# Altium PCB Печтаная плата.PcbDoc
Units mm, origin at the board's own origin, x right, y up, seen from the top; angles counter-clockwise.
Board outline 140 x 100 mm, 4 copper layers ([1]Top, [2]MWGND, [3]Signal, [4]Power), stack 1.271 mm thick; 48 components, 23 nets, 192 pads, 881 vias.
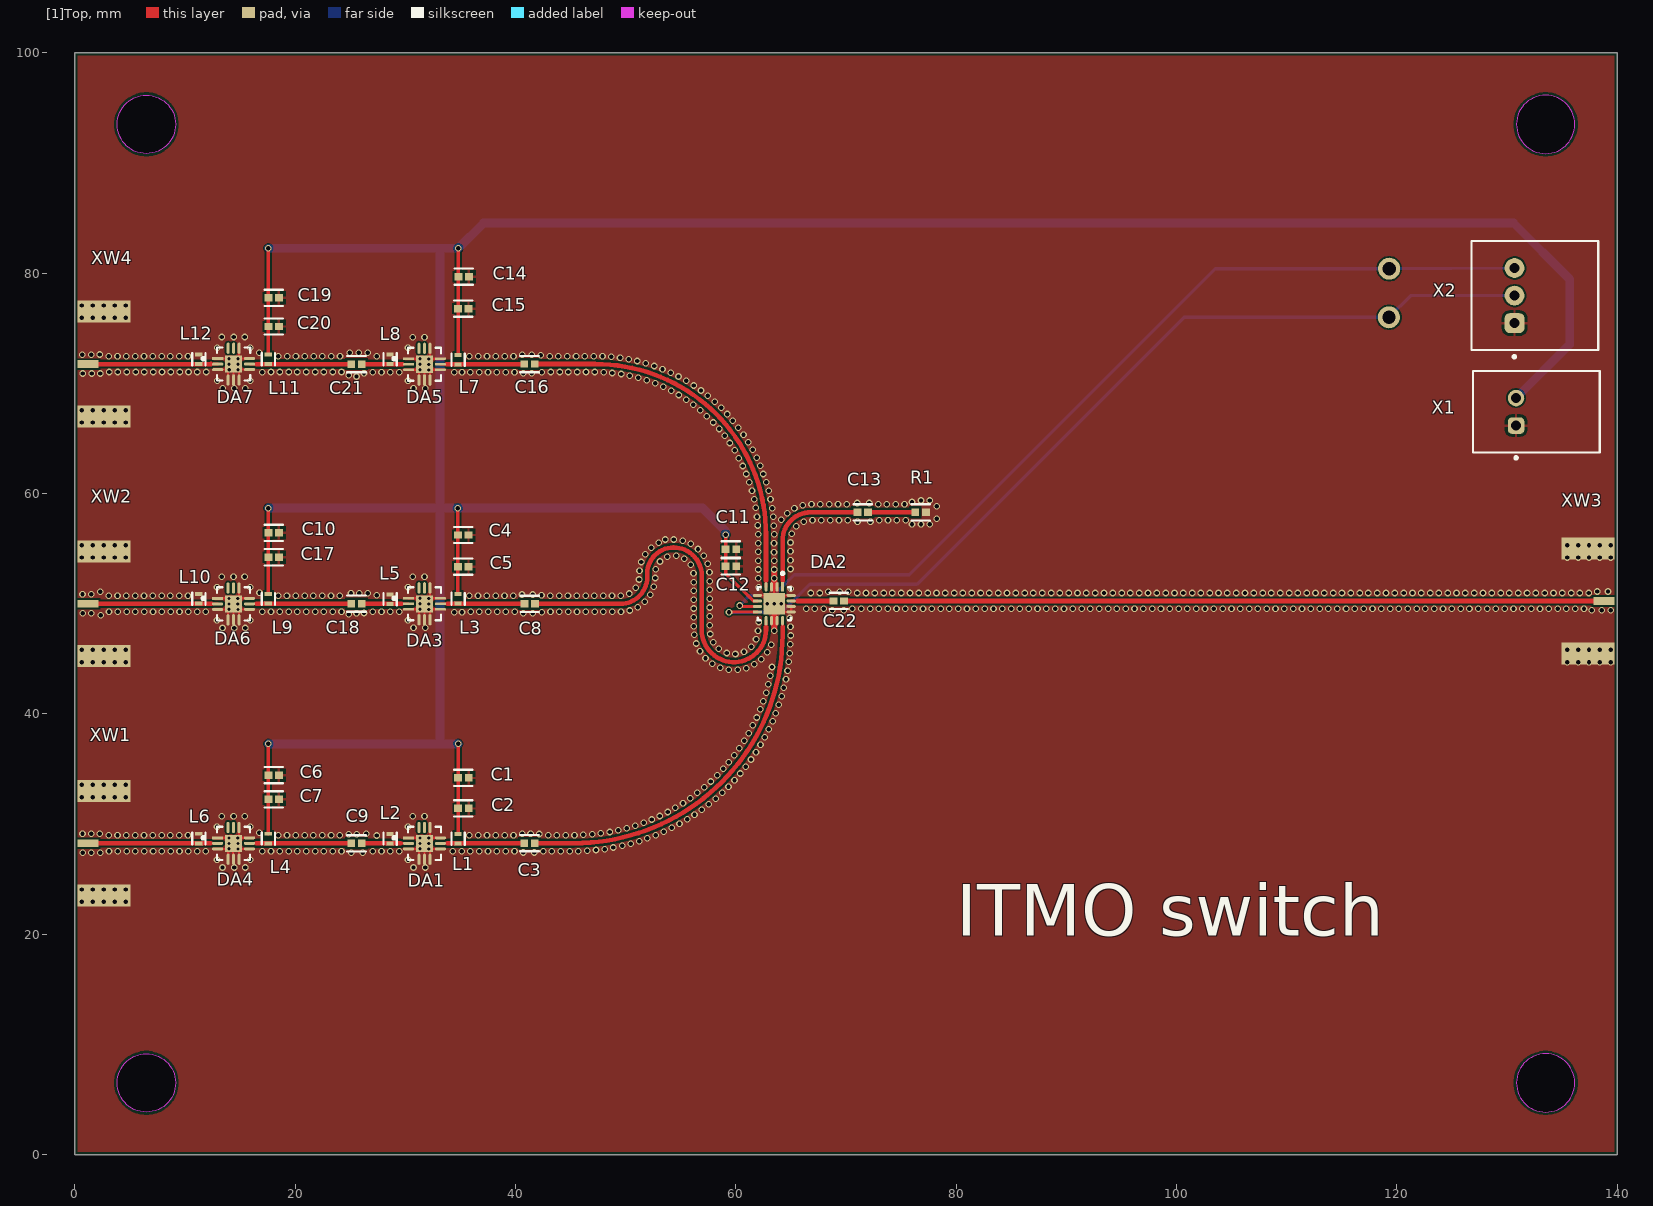
[diagram p0: [1]Top view]
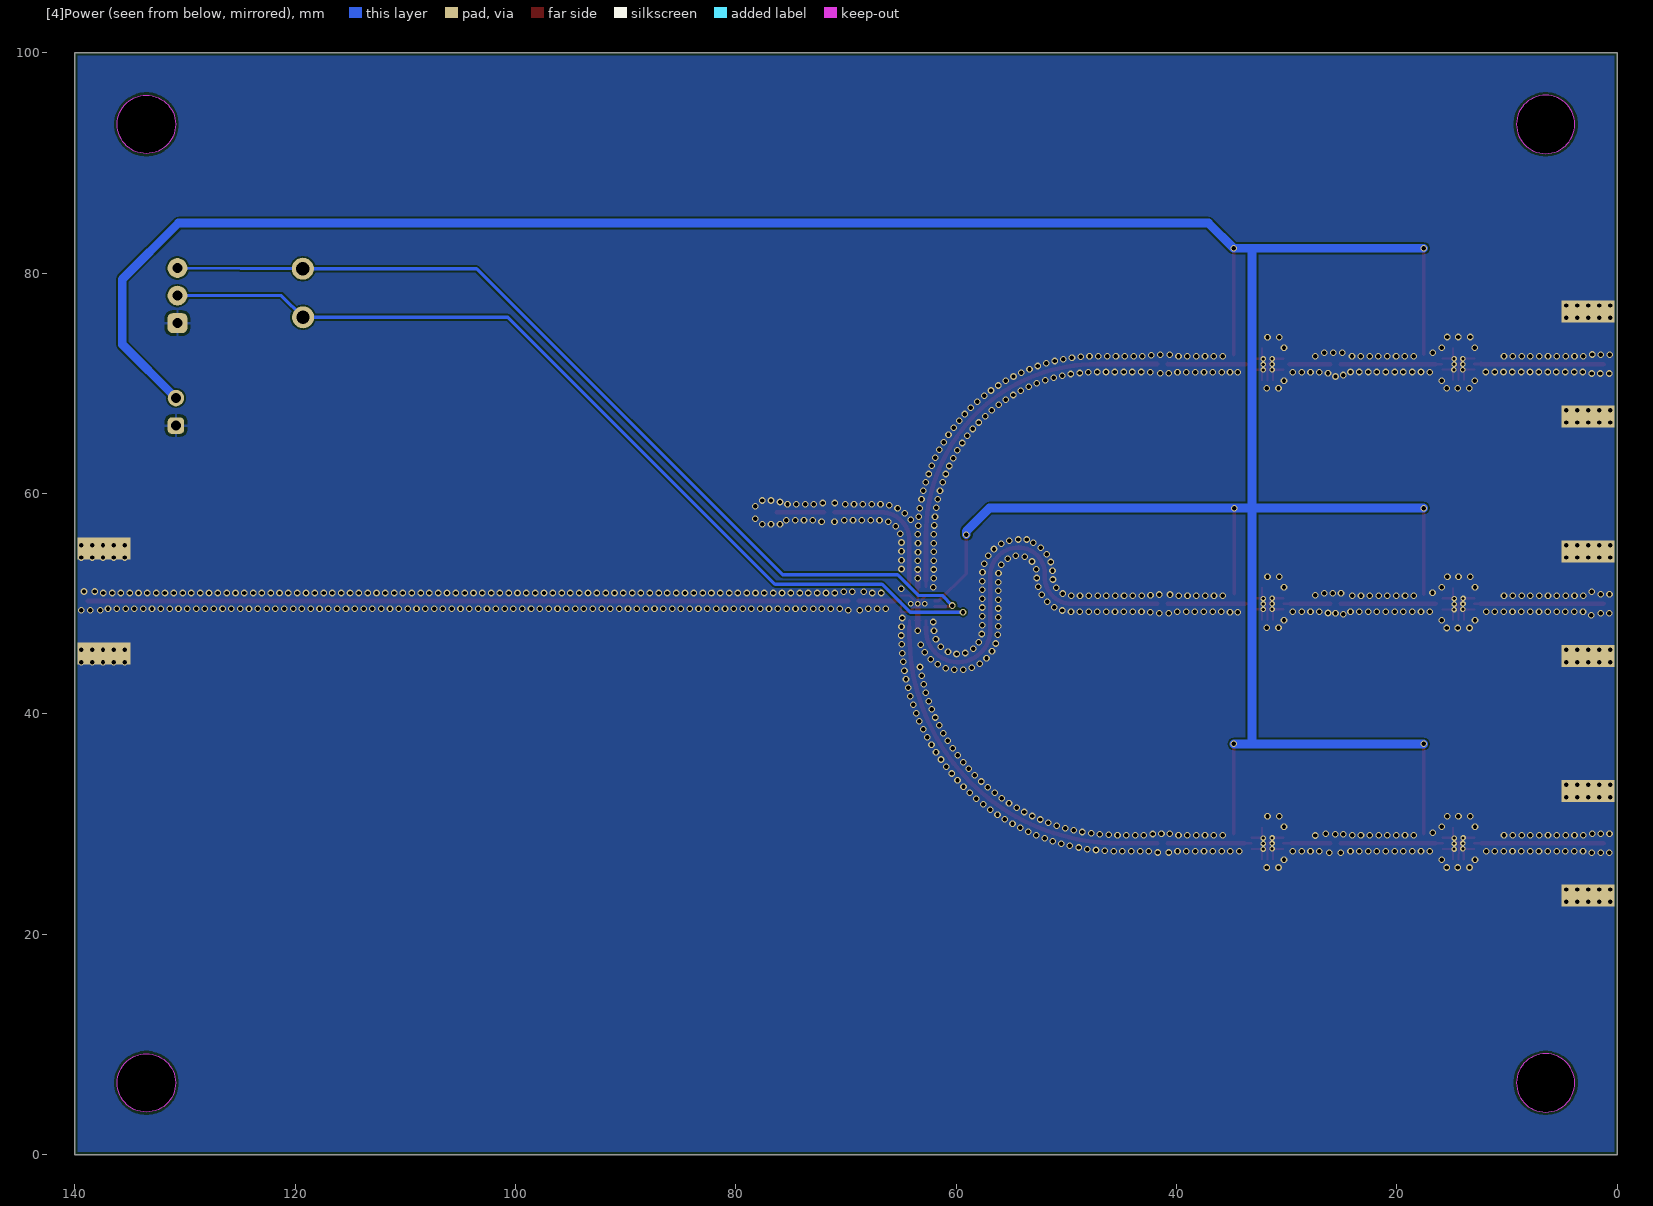
[diagram p1: [4]Power view, seen from below]
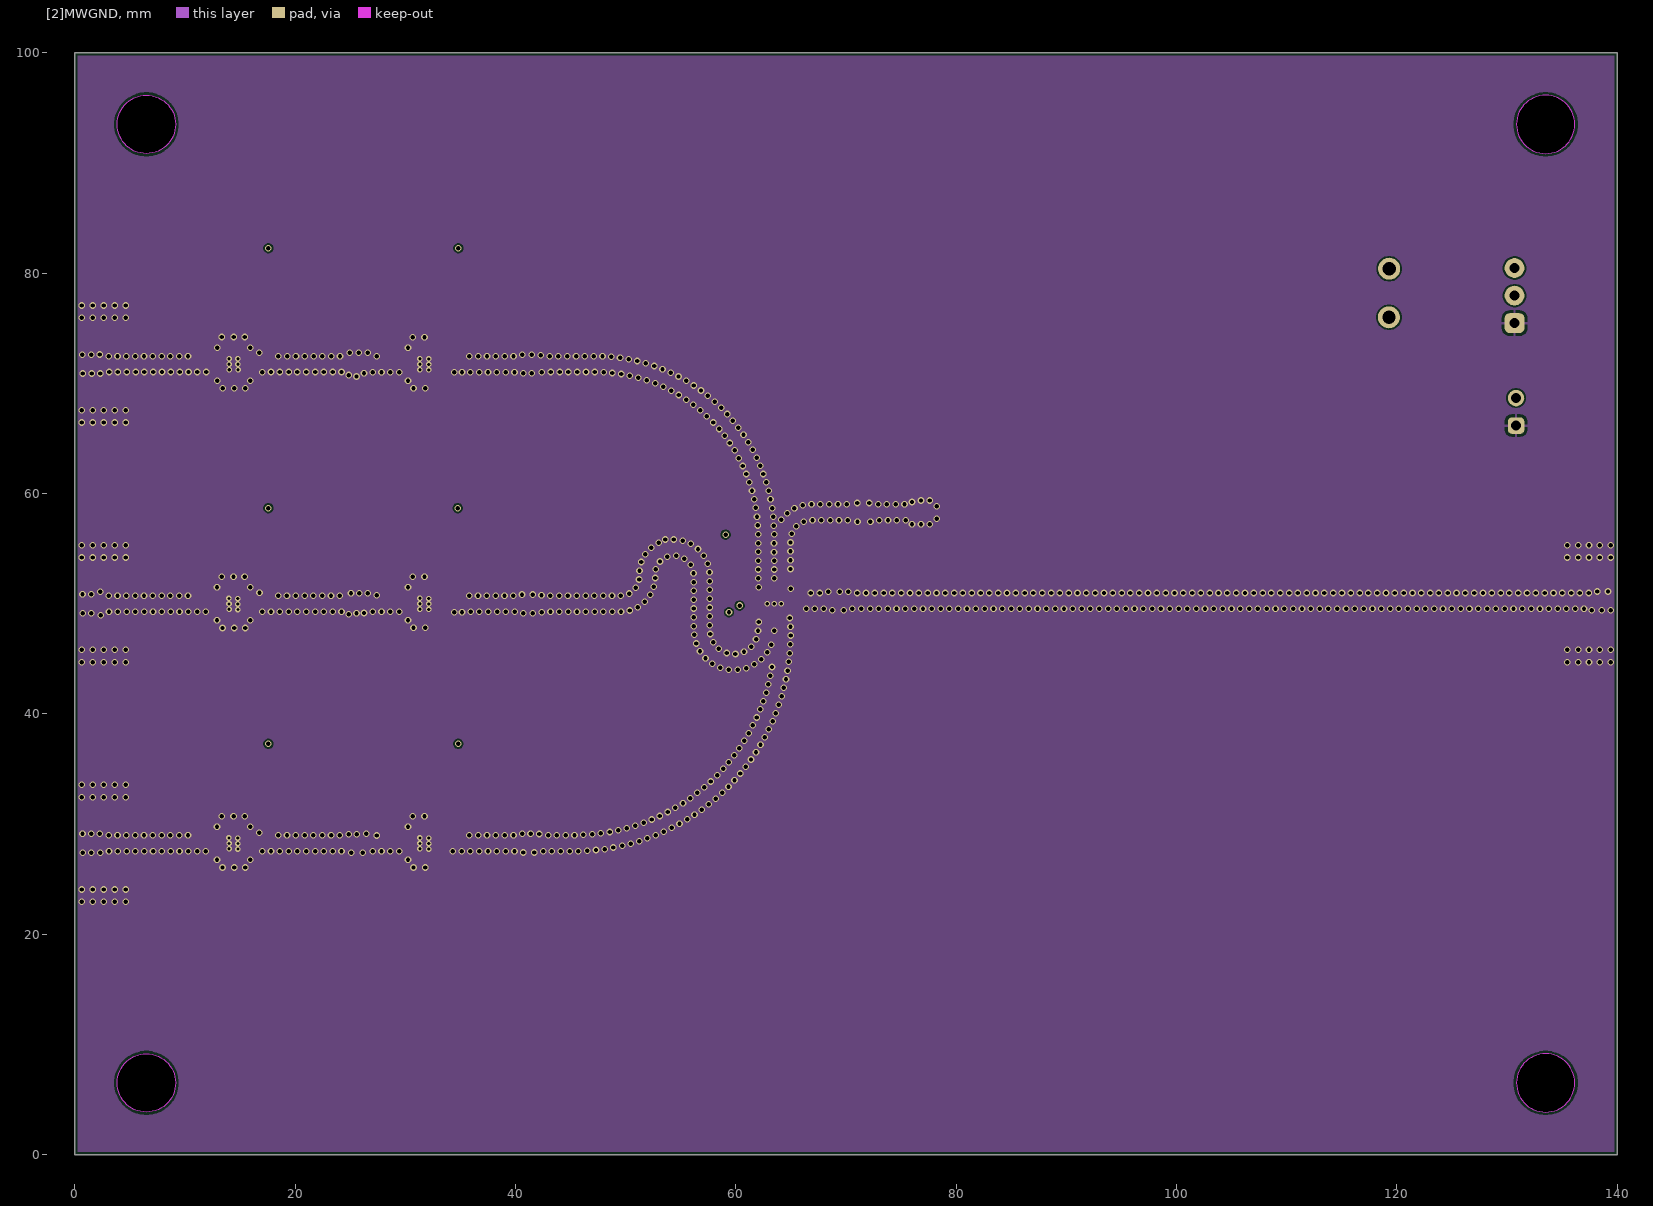
[diagram p2: [2]MWGND]
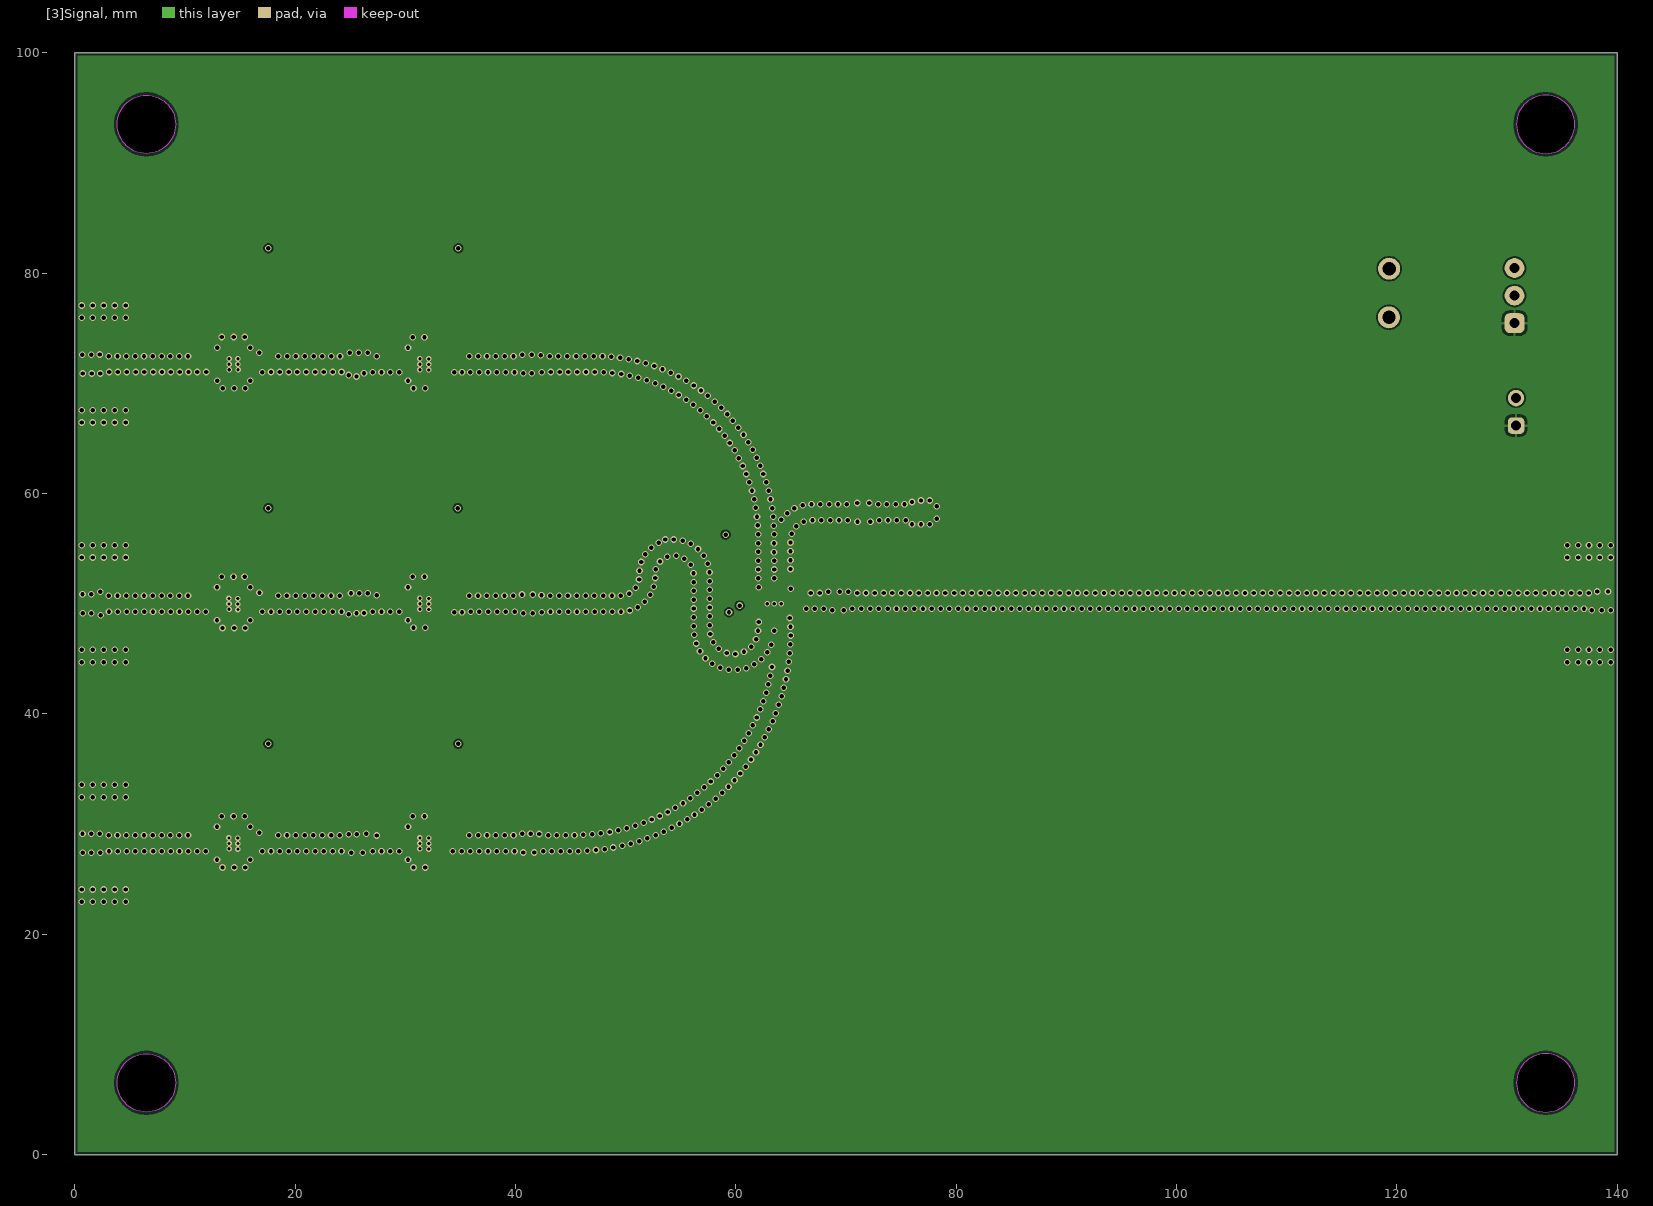
[diagram p3: [3]Signal]
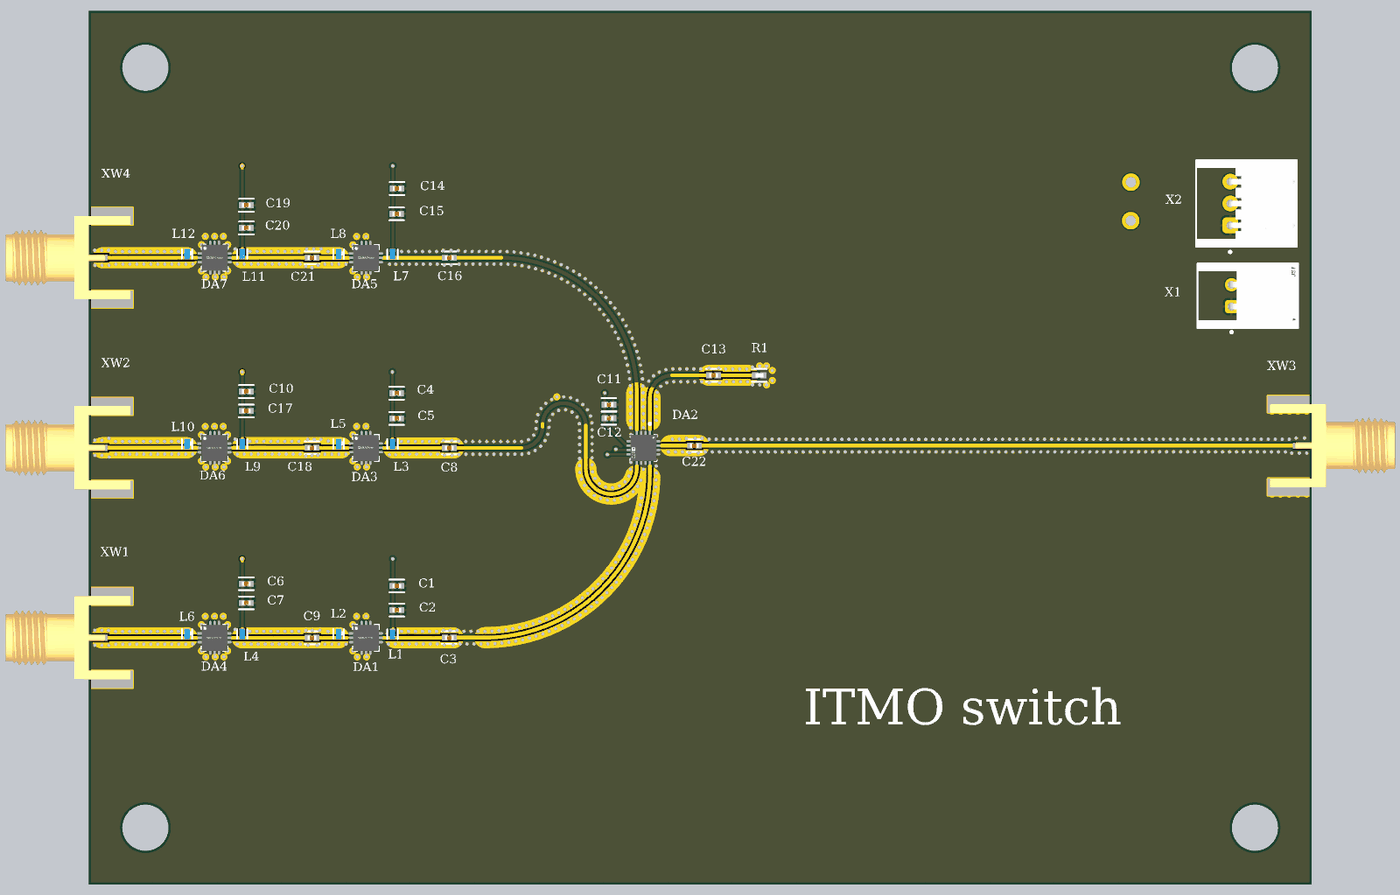
[diagram p4: 3D render of the assembled board from above, using the file's embedded part models]

## Layer stack, top to bottom
Top Solder: solder mask 0.0102, Solder Resist, Dk 3.5
[1]Top: signal copper 0.018
RO4003C: core 0.2032, Core-026, Dk 3.38
[2]MWGND: signal copper 0.018
Dielectric 1: prepreg 0.2083, PP-022, Dk 4.5
[3]Signal: signal copper 0.018
FR-4: core 0.7874, Core-040, Dk 4.6
[4]Power: signal copper 0.018
Bottom Solder: solder mask 0.0102, Solder Resist, Dk 3.5

## Board outline
0.006,0.006 140.006,0.006 140.006,100.006 0.006,100.006
cut-out: 6.506,3.856 cw(c6.506,6.506) 3.856,6.506 cw(c6.506,6.506) 6.506,9.156 cw(c6.506,6.506) 9.156,6.506 cw(c6.506,6.506)
cut-out: 130.856,6.506 ccw(c133.506,6.506) 133.506,3.856 ccw(c133.506,6.506) 136.156,6.506 ccw(c133.506,6.506) 133.506,9.156 ccw(c133.506,6.506)
cut-out: 130.856,93.506 ccw(c133.506,93.506) 133.506,90.856 ccw(c133.506,93.506) 136.156,93.506 ccw(c133.506,93.506) 133.506,96.156 ccw(c133.506,93.506)
cut-out: 6.506,90.856 cw(c6.506,93.506) 3.856,93.506 cw(c6.506,93.506) 6.506,96.156 cw(c6.506,93.506) 9.156,93.506 cw(c6.506,93.506)

## Design rules (kind name [scope] priority, off if disabled: settings)
BoardOutlineClearance [All] p1: gap=0.25 ignorepadtopadclearanceinfootprint=FALSE
Clearance CPWG_1 [InNetClass('RF') vs InNet('GND')] p1: gap=0.2 ignorepadtopadclearanceinfootprint=FALSE except(0.15: Arc-SMDPad Track-SMDPad SMDPad-SMDPad)
Clearance [All] p2: gap=0.15 ignorepadtopadclearanceinfootprint=FALSE
MatchedLengths lia_zochem_ti_umer [InNetClass('RF')] p1: tolerance=1 checknetsindiffpair=TRUE checkdiffpairvsdiffpair=FALSE checkxsignals=FALSE checkothers=FALSE
MinimumSolderMaskSliver [All] p1: minsoldermaskwidth=0.15
PolygonConnect RF_COMPONENTS [(HasFootprint('S-P2152-19CQA') OR HasFootprint('FP-0402HP-MFG')) OR    HasFootprint('FP-DQ1225-IPC_A')  OR HasFootprint('FP-CR0402-IPC_A')  OR HasFootprint('FP-CP-16-38-IPC_A') vs InNet('GND')] p1: connectstyle=Direct reliefconductorwidth=0.254 reliefentries=4 polygonreliefangle="90 Angle" airgapwidth=0.15
PolygonConnect [All] p2: thpad.connectstyle=Relief thpad.reliefconductorwidth=0.254 thpad.reliefentries=4 thpad.polygonreliefangle="90 Angle" thpad.airgapwidth=0.254 smdpad.connectstyle=Relief smdpad.reliefconductorwidth=0.254 smdpad.reliefentries=4 smdpad.polygonreliefangle="90 Angle" smdpad.airgapwidth=0.254 via.connectstyle=Direct via.reliefconductorwidth=0.254 via.reliefentries=4 via.polygonreliefangle="90 Angle" via.airgapwidth=0.254
RoutingVias [All] p1: holewidth=0.4 width=0.6 viastyle="Through Hole" minholewidth=0.3 minwidth=0.5 maxholewidth=0.711 maxwidth=1
SolderMaskExpansion CPWG [InNetClass('RF')] p1: expansion=1 istentingtop=FALSE
SolderMaskExpansion [All] p2: expansion=0.102 istentingtop=FALSE
SupplyNets "Schematic Supply Nets_1" [InNet('+5')] p1: voltage=0.000
SupplyNets "Schematic Supply Nets" [InNet('GND')] p2: voltage=0.000
Width micro_strip [InNetClass('RF')] p1: maxlimit=0.5 minlimit=0.254 preferedwidth=0.254 toplayer_minwidth=0.418 toplayer_maxwidth=0.418 toplayer_prefwidth=0.418 impedanceprofiledriven=TRUE impedanceprofileid={426BE0D7-A08D-4F41-A99D-DD10C29EF04F} impedanceprofilevalue=50.000000 minimp=50.000000 maximp=50.000000 favimp=50.000000 checkconnectedcopper=TRUE
Width [All] p2: maxlimit=0.8 minlimit=0.2 preferedwidth=0.3
29 further rules are at their usual default settings.

## Classes and differential pairs
net class RF_SAME: NetC3_1 NetC8_1 NetC9_2 NetC18_2 NetC21_1 NetDA7_2
net class RF: NetC3_1 NetC3_2 NetC8_1 NetC8_2 NetC9_1 NetC9_2 NetC13_1 NetC13_2 NetC16_1 NetC16_2 NetC18_1 NetC18_2 NetC21_1 NetC21_2 NetC22_1 NetC22_2 NetDA4_2 NetDA6_2 NetDA7_2
component class AMP4: XW3
component class AMP3: DA5 XW4
component class AMP2: DA3
component class AMP1: DA1 DA6 DA7 XW1

## Components (designator, comment, footprint, x,y, rotation, side; value= is the part's Value field where it differs from the comment)
C1 "10pF" FP-GJM155-0_05-IPC_A 35.285,34.186 r0 top
C2 "10nF" FP-GJM155-0_05-IPC_A 35.285,31.417 r0 top
C3 "100 pF" FP-GJM155-0_05-IPC_A 41.279,28.268 r180 top
C4 "10pF" FP-GJM155-0_05-IPC_A 35.259,56.233 r0 top
C5 "10nF" FP-GJM155-0_05-IPC_A 35.259,53.363 r0 top
C6 "10pF" FP-GJM155-0_05-IPC_A 18.057,34.434 r0 top
C7 "10nF" FP-GJM155-0_05-IPC_A 18.057,32.244 r0 top
C8 "100pF" FP-GJM155-0_05-IPC_A 41.296,49.985 r180 top
C9 "100 pF" FP-GJM155-0_05-IPC_A 25.578,28.251 r180 top
C10 "10pF" FP-GJM155-0_05-IPC_A 18.057,56.437 r0 top
C11 "10 nF" FP-GJM155-0_05-IPC_A 59.563,54.938 r180 top
C12 "10 pF" FP-GJM155-0_05-IPC_A 59.563,53.388 r180 top
C13 "100pF" FP-GJM155-0_05-IPC_A 71.526,58.291 r180 top
C14 "10pF" FP-GJM155-0_05-IPC_A 35.302,79.677 r0 top
C15 "10nF" FP-GJM155-0_05-IPC_A 35.259,76.782 r0 top
C16 "100pF" FP-GJM155-0_05-IPC_A 41.279,71.753 r180 top
C17 "10nF" FP-GJM155-0_05-IPC_A 18.057,54.217 r0 top
C18 "100 pF" FP-GJM155-0_05-IPC_A 25.578,50 r180 top
C19 "10pF" FP-GJM155-0_05-IPC_A 18.057,77.764 r0 top
C20 "10nF" FP-GJM155-0_05-IPC_A 18.057,75.16 r0 top
C21 "100 pF" FP-GJM155-0_05-IPC_A 25.578,71.75 r180 top
C22 "100 pF" FP-GJM155-0_05-IPC_A 69.342,50.25 r180 top
DA1 "PMA3-83LN+" FP-DQ1225-IPC_A 31.751,28.25 r0 top
DA2 "HMC7992" FP-CP-16-38-IPC_A 63.5,50 r270 top
DA3 "PMA3-83LN+" FP-DQ1225-IPC_A 31.751,49.993 r0 top
DA4 "PMA3-83LN+" FP-DQ1225-IPC_A 14.42,28.251 r0 top
DA5 "PMA3-83LN+" FP-DQ1225-IPC_A 31.751,71.735 r0 top
DA6 "PMA3-83LN+" FP-DQ1225-IPC_A 14.419,49.987 r0 top
DA7 "PMA3-83LN+" FP-DQ1225-IPC_A 14.428,71.747 r0 top
L1 "39 nH" FP-0402HP-MFG 34.798,28.671 r90 top
L2 "18nH" FP-0402HP-MFG 28.626,28.677 r270 top
L3 "39nH" FP-0402HP-MFG 34.798,50.439 r90 top
L4 "39 nH" FP-0402HP-MFG 17.579,28.686 r90 top
L5 "18nF" FP-0402HP-MFG 28.626,50.417 r270 top
L6 "18nH" FP-0402HP-MFG 11.268,28.686 r270 top
L7 "39nH" FP-0402HP-MFG 34.798,72.156 r90 top
L8 "18nH" FP-0402HP-MFG 28.626,72.181 r270 top
L9 "39 nH" FP-0402HP-MFG 17.579,50.435 r90 top
L10 "18nH" FP-0402HP-MFG 11.268,50.435 r270 top
L11 "39 nH" FP-0402HP-MFG 17.579,72.185 r90 top
L12 "18nH" FP-0402HP-MFG 11.268,72.185 r270 top
R1 "100" FP-CR0402-IPC_A 76.775,58.291 r180 top
X1 "JST-2P" FP-S2B-XH-A-1_LF_SN-MFG 132.67,67.415 r270 top
X2 "JST-3P" FP-S3B-XH-A-1_LF_SN-MFG 132.535,77.965 r270 top
XW1 "SMA" S-P2152-19CQA 2.676,33 r180 top
XW2 "SMA" S-P2152-19CQA 2.676,54.75 r180 top
XW3 "SMA" S-P2152-19CQA 137.349,45.5 r0 top
XW4 "SMA" S-P2152-19CQA 2.676,76.5 r180 top

## Footprints (in the part's own frame and the unit in brackets; to place one, negate y for a bottom-side part, rotate by r counter-clockwise, add the part's x,y. Pads: shape width x height; smd on the part's side, far side on the other; paste and mask are expansions set on the pad)
FP-0402HP-MFG [mm]
  rect 0.36x0.66 smd paste+0 mask+0: 1(-0.435,0) 2(0.435,0)
  silkscreen extent -0.56,-0.6 0.55,0.6, body extent -0.71,-0.46 0.71,0.46, height 0.25
FP-CP-16-38-IPC_A [mm]
  rect 0.846x0.242 smd paste+0 mask+0: 1(-1.533,0.75)
  rrect100% 0.846x0.242 smd paste+0 mask+0: 2(-1.533,0.25) 3(-1.533,-0.25) 4(-1.533,-0.75) 9(1.533,-0.75) 10(1.533,-0.25) 11(1.533,0.25) 12(1.533,0.75)
  rrect100% 0.242x0.846 smd paste+0 mask+0: 5(-0.75,-1.533) 6(-0.25,-1.533) 7(0.25,-1.533) 8(0.75,-1.533) 13(0.75,1.533) 14(0.25,1.533) 15(-0.25,1.533) 16(-0.75,1.533)
  rect 1.92x1.92 smd paste-1000 mask+0: 17(0,0)
  silkscreen extent -2.88,-1.5 1.5,1.5, body extent -2.46,-2.46 2.46,2.46, height 0.25
FP-CR0402-IPC_A [mm]
  rect 0.715x0.672 smd paste+0 mask+0: 1(-0.479,0) 2(0.479,0)
  silkscreen extent -0.84,-0.74 0.84,0.74, body extent -1.04,-0.54 1.04,0.54, height 0.25
FP-DQ1225-IPC_A [mm]
  rect 1.019x0.262 smd paste+0 mask+0: 1(-1.447,0.5)
  rrect100% 1.019x0.262 smd paste+0 mask+0: 2(-1.447,0) 3(-1.447,-0.5) 7(1.447,-0.5) 8(1.447,0) 9(1.447,0.5)
  rrect100% 0.262x1.019 smd paste+0 mask+0: 4(-0.5,-1.447) 5(0,-1.447) 6(0.5,-1.447) 10(0.5,1.447) 11(0,1.447) 12(-0.5,1.447)
  rect 1.549x1.549 smd paste-1000 mask+0: 13(0,0)
  silkscreen extent -2.88,-1.5 1.5,1.5, body extent -2.46,-2.46 2.46,2.46, height 0.25
FP-GJM155-0_05-IPC_A [mm]
  rect 0.715x0.672 smd paste+0 mask+0: 1(-0.479,0) 2(0.479,0)
  silkscreen extent -0.84,-0.74 0.84,0.74, body extent -1.04,-0.54 1.04,0.54, height 0.25
FP-S2B-XH-A-1_LF_SN-MFG [mm]
  rrect50% 1.5x1.5 hole 0.9 paste-2539.97 mask+0: 1(1.25,-1.85)
  round 1.5 hole 0.9 paste-2539.97 mask+0: 2(-1.25,-1.85)
  silkscreen extent -3.7,-5.75 4.3,5.75, body extent -3.8,-5.85 3.8,5.85, height 0.25
FP-S3B-XH-A-1_LF_SN-MFG [mm]
  rrect50% 1.8x1.8 hole 0.9 paste-2539.97 mask+0: 1(2.5,-1.85)
  round 1.8 hole 0.9 paste-2539.97 mask+0: 2(0,-1.85) 3(-2.5,-1.85)
  silkscreen extent -4.95,-5.75 5.67,5.75, body extent -5.05,-5.85 5.05,5.85, height 0.25
S-P2152-19CQA [mm]
  rect 1.9x0.7 smd: 1(1.45,4.75)
  rect 4.8x2 smd: 2(0,9.5) 2(0,0)
  rect 4.8x2 smd far side: 2(0,9.5) 2(0,0)
  body extent -2.1,-0.02 12.18,9.51, height 4.46

## Part data
C1 C2 C3 C4 C5 C6 C7 C8 C9 C10 C11 C12 C13 C14 C15 C16 C17 C18 C19 C20 C21 C22: library part C
L1 L2 L3 L4 L5 L6 L7 L8 L9 L10 L11 L12: library part L
R1: library part R
X1 X2: "JST type connector", Net1=GND
  X1: Net2=+5V
  X2: Net2=A, Net3=B
DA1 DA4 DA6 DA7 XW1: ClassName=AMP1
DA3 XW2: ClassName=AMP2
DA5 XW4: ClassName=AMP3
XW3: ClassName=AMP4

## Free pads (board coordinates)
  round 2 hole 1.2 paste-2539.97 mask+0: MH5(119.305,80.405) MH6(119.28,75.995)

## Via types
v1: diameter 0.6, hole 0.4, [1]Top to [4]Power, 836 vias
v2: diameter 0.5, hole 0.3, [1]Top to [4]Power, 39 vias
v3: diameter 0.6, hole 0.4, [1]Top to [4]Power, tented both sides, 6 vias

## Nets (pads, with @x,y where several pads share a name; then routed paths per layer and width w, separated by ;. In a path a pad name is that pad's centre, name@x,y a point inside that pad or via, vN(x,y) a via of type N, cw(c..) or ccw(c..) an arc to the next point about the centre after c; other vN are vias at no path point)
+5: C1.1 C2.1 C4.1 C5.1 C6.1 C7.1 C10.1 C11.2 C12.2 C14.1 C15.1 C17.1 C19.1 C20.1 DA2.6 L1.2 L3.2 L4.2 L7.2 L9.2 L11.2 X1.2 | length 297.6
  [1]Top w0.3: L4.2 v1(17.579,37.275) ; L9.2 v1(17.579,58.675) ; L11.2 v1(17.579,82.26) ; v3(34.765,58.675) 34.782,58.659 34.782,50.89 L3.2 ; L1.2 34.807,29.115 34.807,37.267 v3(34.815,37.275) ; L7.2 34.811,72.603 34.811,82.247 v3(34.823,82.26) ; v3(59.084,56.268) C11.2 59.084,52.735 61.569,50.25 DA2.6
  [4]Power w0.8: v1(17.579,37.275) 33.15,37.275 ; v1(17.579,58.675) 33.15,58.675 ; v1(17.579,82.26) 33.15,82.26 ; v3(34.815,37.275) 33.15,37.275 ; v3(59.084,56.268) 59.084,56.581 56.99,58.675 v3(34.765,58.675) 33.15,58.675 ; X1.2 135.695,73.54 135.695,79.445 130.583,84.557 37.12,84.557 v3(34.823,82.26) 33.15,82.26 ; 33.15,37.275 33.15,58.675 ; 33.15,58.675 33.15,82.26
A: DA2.8 pad.MH6 X2.2 | length 85.8
  [1]Top w0.254: v3(59.385,49.223) 59.407,49.244 61.961,49.244 DA2.8
  [4]Power w0.3: v3(59.385,49.223) 64.194,49.223 66.736,51.765 76.455,51.765 100.685,75.995 pad.MH6 121.25,77.965 X2.2
B: DA2.7 pad.MH5 X2.3 | length 84.6
  [1]Top w0.254: v3(60.35,49.832) 60.444,49.832 60.526,49.75 DA2.7
  [4]Power w0.3: v3(60.35,49.832) 61.268,50.75 63.452,50.75 65.327,52.625 75.76,52.625 103.54,80.405 pad.MH5 X2.3
GND: C1.2 C2.2 C4.2 C5.2 C6.2 C7.2 C10.2 C11.1 C12.1 C14.2 C15.2 C17.2 C19.2 C20.2 DA1.1 DA1.3 DA1.4 DA1.5 DA1.6 DA1.7 DA1.9 DA1.10 DA1.13 DA2.2 DA2.3 DA2.5 DA2.10 DA2.11 DA2.13 DA2.14 DA2.16 DA2.17 DA3.1 DA3.3 DA3.4 DA3.5 DA3.6 DA3.7 DA3.9 DA3.10 DA3.13 DA4.1 DA4.3 DA4.4 DA4.5 DA4.6 DA4.7 DA4.9 DA4.10 DA4.13 DA5.1 DA5.3 DA5.4 DA5.5 DA5.6 DA5.7 DA5.9 DA5.10 DA5.13 DA6.1 DA6.3 DA6.4 DA6.5 DA6.6 DA6.7 DA6.9 DA6.10 DA6.13 DA7.1 DA7.3 DA7.4 DA7.5 DA7.6 DA7.7 DA7.9 DA7.10 DA7.13 L2.1 L5.1 L6.1 L8.1 L10.1 L12.1 R1.1 X1.1 X2.1 XW1.2 XW2.2 XW3.2 XW4.2 | length 67.9
  [1]Top w0.2: DA6.3 13.919,49.487 DA6.4 ; DA6.1 13.919,50.487 DA6.13 ; DA4.3 13.746,27.751 14.036,28.041 14.036,28.141 DA4.13@14.146,28.251 ; DA4.1 13.92,28.751 DA4.13 ; DA7.3 13.928,71.247 DA7.4 ; DA7.1 13.928,72.247 DA7.13 DA7.5 ; DA4.4 13.93,26.814 13.93,27.761 DA4.13@14.146,27.976 ; DA4.13@13.933,28.244 13.939,28.251 DA4.13@14.146,28.251 ; DA4.13@14.378,27.977 14.378,27.293 14.408,27.263 14.408,26.815 DA4.5 ; DA6.5 DA6.13 ; DA6.6 DA6.13@14.919,49.487 ; DA6.10 14.919,50.487 DA6.9 ; DA4.6 14.92,27.751 DA4.7 ; DA4.10 DA4.13@14.92,28.751 ; DA7.6 14.928,71.247 DA7.7 ; DA7.10 14.928,72.247 DA7.9 ; DA6.7 DA6.13@14.919,49.487 ; DA4.9 DA4.13@14.92,28.751 ; DA1.3 31.251,27.75 DA1.4 ; DA1.1 31.251,28.75 DA1.13 DA1.5 ; DA3.3 31.251,49.493 DA3.4 ; DA3.1 31.251,50.493 DA3.13 DA3.5 ; DA5.3 31.251,71.235 DA5.4 ; DA5.1 31.251,72.235 DA5.13 DA5.5 ; DA1.6 32.251,27.75 DA1.7 ; DA1.10 32.251,28.75 DA1.9 ; DA3.6 32.251,49.493 DA3.7 ; DA3.10 32.251,50.493 DA3.9 ; DA5.6 32.251,71.235 DA5.7 ; DA5.10 32.251,72.235 DA5.9 ; DA2.5 62.75,50.75 v2(63.5,50) 64.25,50.75 DA2.16 ; DA2.10 63.5,48.467 DA2.11 ; DA2.17@63.5,50.185 63.5,51.533 ; DA2.17@63.554,49.946 64.25,49.25 DA2.13 DA2.14 ; DA4.13@14.146,27.976 14.42,27.976 DA4.13 ; DA4.13@14.146,27.976 DA4.13 ; DA4.13@14.146,28.251 DA4.13 ; DA6.13 DA6.13@14.919,49.487 ; DA4.13 DA4.13@14.92,28.751
  [1]Top w0.5: v1(63.5,47.544) 63.5,48.467 v2(63.5,50) ; 63.5,51.533 v1(63.5,53.104)
  other v1: 0.66,22.946 1.651,22.946 2.642,22.946 3.632,22.946 4.623,22.946 0.66,24.064 1.651,24.064 2.642,24.064 3.632,24.064 4.623,24.064 13.42,26.06 14.489,26.06 15.489,26.06 30.751,26.06 31.819,26.06 12.92,26.751 15.92,26.751 30.251,26.75 0.72,27.39 1.52,27.39 2.311,27.381 25.099,27.407 26.161,27.404 40.71,27.422 41.727,27.422 27.049,27.519 27.849,27.519 3.114,27.527 3.914,27.527 4.714,27.527 5.514,27.527 6.314,27.527 7.114,27.527 7.914,27.527 8.714,27.527 9.514,27.527 10.314,27.527 11.114,27.527 11.914,27.532 17.018,27.524 17.818,27.528 18.618,27.528 19.418,27.528 20.218,27.528 21.018,27.528 21.818,27.528 22.618,27.528 23.418,27.528 24.218,27.528 28.649,27.524 29.449,27.527 34.318,27.527 35.118,27.536 35.918,27.536 36.718,27.536 37.518,27.536 38.318,27.536 39.118,27.536 39.918,27.536 42.517,27.545 43.317,27.545 44.117,27.545 44.917,27.545 45.717,27.55 46.517,27.578 47.314,27.647 48.109,27.732 48.897,27.872 49.682,28.025 50.457,28.223 51.225,28.446 51.985,28.698 27.404,28.965 3.089,28.973 3.889,28.973 4.689,28.973 5.489,28.973 6.289,28.973 7.089,28.973 7.889,28.973 8.689,28.973 9.489,28.973 10.289,28.973 18.47,28.974 19.27,28.974 20.07,28.974 20.87,28.974 21.67,28.974 22.47,28.974 23.27,28.974 24.07,28.974 35.825,28.982 36.625,28.982 37.425,28.982 38.225,28.982 39.025,28.982 39.825,28.982 42.968,28.991 43.768,28.991 44.568,28.991 45.368,28.988 52.73,28.989 46.168,29.017 46.966,29.068 24.874,29.087 25.601,29.093 0.713,29.11 1.513,29.11 2.286,29.108 26.458,29.108 40.615,29.114 41.376,29.109 42.176,29.102 47.761,29.154 16.768,29.216 48.551,29.283 53.469,29.295 49.336,29.434 50.112,29.632 54.186,29.65 12.92,29.751 15.92,29.751 30.251,29.75 50.879,29.859 54.896,30.018 51.638,30.111 52.379,30.413 55.584,30.427 13.352,30.708 14.42,30.708 15.42,30.708 30.682,30.707 31.751,30.707 53.111,30.734 56.259,30.857 53.827,31.092 56.916,31.313 54.524,31.484 57.549,31.801 55.211,31.895 58.172,32.303 55.868,32.351 0.66,32.446 1.651,32.446 2.642,32.446 3.632,32.446 4.623,32.446 56.511,32.827 58.76,32.846 57.134,33.329 59.338,33.399 0.66,33.564 1.651,33.564 2.642,33.564 3.632,33.564 4.623,33.564 57.727,33.866 59.883,33.985 58.305,34.418 60.409,34.587 58.85,35.004 60.911,35.21 59.372,35.611 61.382,35.857 59.874,36.234 61.838,36.514 60.333,36.889 62.249,37.2 60.774,37.556 62.648,37.894 61.182,38.244 63.006,38.609 61.556,38.952 63.342,39.336 61.91,39.669 63.648,40.075 62.216,40.408 63.917,40.828 62.498,41.157 64.17,41.587 62.751,41.916 64.371,42.361 62.958,42.688 64.559,43.139 63.144,43.466 64.701,43.926 59.377,44.005 60.177,43.996 60.96,44.156 58.599,44.191 63.287,44.254 61.688,44.49 57.882,44.546 0.66,44.696 1.651,44.696 2.642,44.696 3.632,44.696 4.623,44.696 135.459,44.696 136.45,44.696 137.44,44.696 138.431,44.696 139.422,44.696 64.819,44.717 62.329,44.968 57.255,45.044 59.973,45.435 59.178,45.525 64.904,45.513 62.847,45.578 60.749,45.631 56.758,45.67 0.66,45.814 1.651,45.814 2.642,45.814 3.632,45.814 4.623,45.814 135.459,45.814 136.45,45.814 137.44,45.814 138.431,45.814 139.422,45.814 58.472,45.902 61.403,46.091 63.217,46.287 64.951,46.312 56.403,46.387 57.947,46.505 61.843,46.759 64.979,47.111 56.217,47.165 57.668,47.255 62.019,47.54 13.419,47.796 14.488,47.796 15.488,47.796 30.751,47.802 31.819,47.802 64.973,47.911 56.189,47.965 57.634,48.054 62.077,48.337 12.919,48.487 15.919,48.487 30.251,48.493 64.891,48.707 56.189,48.765 57.634,48.854 2.362,48.946 24.867,49.047 25.578,49.13 0.718,49.14 1.518,49.14 26.257,49.154 40.728,49.139 41.593,49.139 34.443,49.215 35.153,49.215 42.389,49.219 43.188,49.262 43.988,49.262 44.788,49.262 45.588,49.262 46.388,49.262 47.188,49.262 47.988,49.262 48.788,49.262 49.588,49.261 3.112,49.277 3.912,49.277 4.712,49.277 5.512,49.277 6.312,49.277 7.112,49.277 7.912,49.277 8.712,49.277 9.512,49.277 10.312,49.277 11.112,49.277 11.912,49.273 17.018,49.274 17.818,49.277 18.618,49.277 19.418,49.277 20.218,49.277 21.018,49.277 21.818,49.277 22.618,49.277 23.418,49.277 24.218,49.277 27.048,49.268 27.848,49.268 28.648,49.268 29.448,49.273 35.938,49.266 36.738,49.266 37.538,49.266 38.338,49.266 39.138,49.266 39.938,49.266 50.379,49.38 137.7,49.39 138.582,49.39 139.422,49.39 68.773,49.404 69.8,49.404 66.383,49.527 67.183,49.527 67.983,49.527 70.591,49.527 71.391,49.527 72.191,49.527 72.991,49.527 73.791,49.527 74.591,49.527 75.391,49.527 76.191,49.527 76.991,49.527 77.791,49.527 78.591,49.527 79.391,49.527 80.191,49.527 80.991,49.527 81.791,49.527 82.591,49.527 83.391,49.527 84.191,49.527 84.991,49.527 85.791,49.527 86.591,49.527 87.391,49.527 88.191,49.527 88.991,49.527 89.791,49.527 90.591,49.527 91.391,49.527 92.191,49.527 92.991,49.527 93.791,49.527 94.591,49.527 95.391,49.527 96.191,49.527 96.991,49.527 97.791,49.527 98.591,49.527 99.391,49.527 100.191,49.527 100.991,49.527 101.791,49.527 102.591,49.527 103.391,49.527 104.191,49.527 104.991,49.527 105.791,49.527 106.591,49.527 107.391,49.527 108.191,49.527 108.991,49.527 109.791,49.527 110.591,49.527 111.391,49.527 112.191,49.527 112.991,49.527 113.791,49.527 114.591,49.527 115.391,49.527 116.191,49.527 116.991,49.527 117.791,49.527 118.591,49.527 119.391,49.527 120.191,49.527 120.991,49.527 121.791,49.527 122.591,49.527 123.391,49.527 124.191,49.527 124.991,49.527 125.791,49.527 126.591,49.527 127.391,49.527 128.191,49.527 128.991,49.527 129.791,49.527 130.591,49.527 131.391,49.527 132.191,49.527 132.991,49.527 133.791,49.527 134.591,49.527 135.391,49.527 136.191,49.527 136.991,49.527 56.189,49.565 57.634,49.654 51.116,49.692 51.753,50.176 56.189,50.365 57.634,50.454 43.17,50.708 43.97,50.708 44.77,50.708 45.57,50.708 46.37,50.708 47.17,50.708 47.97,50.708 48.77,50.708 3.089,50.723 3.889,50.723 4.689,50.723 5.489,50.723 6.289,50.723 7.089,50.723 7.889,50.723 8.689,50.723 9.489,50.723 10.289,50.723 18.467,50.723 19.267,50.723 20.067,50.723 20.867,50.723 21.667,50.723 22.467,50.723 23.267,50.723 24.067,50.723 35.809,50.712 36.609,50.712 37.409,50.712 38.209,50.712 39.009,50.712 39.809,50.712 49.57,50.712 27.432,50.775 42.372,50.762 52.243,50.808 40.6,50.831 41.575,50.831 0.715,50.86 1.515,50.86 50.342,50.922 25.078,50.962 25.832,50.962 26.614,50.962 16.775,50.978 66.818,50.973 67.618,50.973 71.019,50.973 71.819,50.973 72.619,50.973 73.419,50.973 74.219,50.973 75.019,50.973 75.819,50.973 76.619,50.973 77.419,50.973 78.219,50.973 79.019,50.973 79.819,50.973 80.619,50.973 81.419,50.973 82.219,50.973 83.019,50.973 83.819,50.973 84.619,50.973 85.419,50.973 86.219,50.973 87.019,50.973 87.819,50.973 88.619,50.973 89.419,50.973 90.219,50.973 91.019,50.973 91.819,50.973 92.619,50.973 93.419,50.973 94.219,50.973 95.019,50.973 95.819,50.973 96.619,50.973 97.419,50.973 98.219,50.973 99.019,50.973 99.819,50.973 100.619,50.973 101.419,50.973 102.219,50.973 103.019,50.973 103.819,50.973 104.619,50.973 105.419,50.973 106.219,50.973 107.019,50.973 107.819,50.973 108.619,50.973 109.419,50.973 110.219,50.973 111.019,50.973 111.819,50.973 112.619,50.973 113.419,50.973 114.219,50.973 115.019,50.973 115.819,50.973 116.619,50.973 117.419,50.973 118.219,50.973 119.019,50.973 119.819,50.973 120.619,50.973 121.419,50.973 122.219,50.973 123.019,50.973 123.819,50.973 124.619,50.973 125.418,50.973 126.218,50.973 127.018,50.973 127.818,50.973 128.618,50.973 129.418,50.973 130.218,50.973 131.018,50.973 131.818,50.973 132.618,50.973 133.418,50.973 134.218,50.973 135.018,50.973 135.818,50.973 136.618,50.973 137.418,50.973 2.337,51.079 68.411,51.077 69.427,51.088 70.227,51.086 138.207,51.11 139.167,51.11 56.189,51.165 57.634,51.254 65,51.375 50.941,51.452 12.919,51.487 15.919,51.487 30.251,51.493 62.084,51.506 52.565,51.54 56.189,51.965 57.634,52.054 51.223,52.201 62.027,52.304 52.69,52.331 63.5,52.318 13.35,52.443 14.419,52.443 15.419,52.443 30.682,52.45 31.751,52.45 56.167,52.764 57.616,52.854 51.262,53 62.027,53.104 52.749,53.128 64.973,53.153 55.904,53.52 57.449,53.636 51.432,53.782 53.128,53.833 62.027,53.904 63.5,53.904 64.973,53.953 55.342,54.089 0.66,54.196 1.651,54.196 2.642,54.196 3.632,54.196 4.623,54.196 135.459,54.196 136.45,54.196 137.44,54.196 138.431,54.196 139.422,54.196 53.793,54.278 54.589,54.359 57.09,54.351 51.794,54.495 63.473,54.686 62.027,54.704 64.973,54.753 56.572,54.961 52.338,55.082 0.66,55.314 1.651,55.314 2.642,55.314 3.632,55.314 4.623,55.314 135.459,55.314 136.45,55.314 137.44,55.314 138.431,55.314 139.422,55.314 55.923,55.428 62.027,55.504 63.473,55.486 53.007,55.52 64.973,55.553 55.177,55.719 53.598,55.83 54.385,55.83 63.48,56.286 62.029,56.304 65.081,56.345 65.498,57.028 63.449,57.086 61.997,57.103 75.997,57.201 76.81,57.201 77.597,57.201 66.175,57.454 71.048,57.445 72.225,57.445 66.967,57.568 67.767,57.568 68.567,57.568 69.367,57.568 70.167,57.568 73.016,57.568 73.816,57.568 74.616,57.568 75.416,57.568 64.122,57.633 78.257,57.7 63.391,57.884 61.929,57.9 64.665,58.221 63.297,58.678 65.328,58.668 61.826,58.693 78.257,58.852 66.083,58.932 66.879,59.013 67.679,59.013 68.479,59.013 69.279,59.013 70.079,59.013 72.919,59.014 73.719,59.014 74.519,59.014 75.319,59.014 71.026,59.137 72.128,59.137 75.997,59.233 76.81,59.37 77.597,59.37 63.151,59.465 61.67,59.478 61.471,60.253 62.98,60.246 61.239,61.019 62.763,61.016 60.962,61.769 62.506,61.774 60.639,62.501 62.226,62.523 60.284,63.218 61.891,63.25 59.893,63.916 61.529,63.963 59.454,64.585 61.138,64.661 58.986,65.233 60.7,65.33 58.491,65.861 60.24,65.985 0.66,66.446 1.651,66.446 2.642,66.446 3.632,66.446 4.623,66.446 57.948,66.449 59.745,66.613 57.379,67.012 59.216,67.213 56.787,67.55 0.66,67.564 1.651,67.564 2.642,67.564 3.632,67.564 4.623,67.564 58.668,67.796 56.159,68.045 58.08,68.339 55.506,68.507 57.471,68.858 54.833,68.941 54.135,69.332 56.843,69.353 13.428,69.557 14.497,69.557 15.497,69.557 30.751,69.545 31.819,69.545 53.415,69.68 56.18,69.801 52.681,69.997 30.251,70.235 55.503,70.228 12.928,70.247 15.928,70.247 51.93,70.274 51.162,70.499 54.805,70.619 25.578,70.625 50.386,70.69 24.874,70.753 49.601,70.846 0.733,70.89 1.533,70.89 2.337,70.891 26.258,70.904 40.71,70.907 41.499,70.907 48.807,70.942 54.086,70.968 48.009,71.003 3.128,71.027 3.928,71.027 4.728,71.027 5.527,71.027 6.327,71.027 7.127,71.027 7.927,71.027 8.727,71.027 9.527,71.027 10.327,71.027 11.127,71.027 11.927,71.031 17.018,71.024 17.818,71.027 18.618,71.027 19.418,71.027 20.218,71.027 21.018,71.027 21.818,71.027 22.618,71.027 23.418,71.027 24.218,71.027 27.049,71.02 27.849,71.02 28.649,71.023 29.449,71.02 34.443,71.021 35.153,71.021 35.918,71.021 36.718,71.021 37.518,71.021 38.318,71.021 39.118,71.021 39.918,71.021 42.41,71.012 43.21,71.03 44.01,71.03 44.81,71.03 45.61,71.03 46.41,71.03 47.21,71.03 53.355,71.294 52.604,71.571 51.842,71.814 51.072,72.031 50.288,72.188 49.499,72.321 48.704,72.415 3.089,72.473 3.889,72.473 4.689,72.473 5.489,72.473 6.289,72.473 7.089,72.473 7.889,72.473 8.689,72.473 9.489,72.473 10.289,72.473 18.484,72.473 19.284,72.473 20.084,72.473 20.884,72.473 21.684,72.473 22.484,72.473 23.284,72.473 24.084,72.473 27.404,72.466 35.826,72.467 36.626,72.467 37.426,72.467 38.226,72.467 39.026,72.467 39.826,72.467 43.106,72.475 43.906,72.475 44.706,72.475 45.506,72.475 46.306,72.475 47.106,72.475 47.906,72.459 42.31,72.56 40.615,72.599 41.499,72.599 0.699,72.61 1.499,72.61 2.286,72.619 16.768,72.774 24.964,72.764 25.776,72.764 26.614,72.764 30.251,73.235 12.928,73.247 15.928,73.247 13.359,74.204 14.428,74.204 15.428,74.204 30.682,74.192 31.751,74.192 0.66,75.946 1.651,75.946 2.642,75.946 3.632,75.946 4.623,75.946 0.66,77.064 1.651,77.064 2.642,77.064 3.632,77.064 4.623,77.064
  other v2: 14.011,27.747 14.818,27.736 31.341,27.747 32.149,27.735 32.146,28.232 14.009,28.244 14.816,28.232 31.339,28.244 14.814,28.729 32.144,28.729 14.007,28.741 31.337,28.74 14.01,49.483 14.817,49.471 31.341,49.489 32.149,49.478 14.815,49.968 32.146,49.974 14.008,49.98 31.339,49.986 62.847,50 64.125,50 14.005,50.477 14.813,50.465 32.144,50.471 31.337,50.483 14.826,71.232 31.341,71.232 32.149,71.22 14.018,71.244 32.146,71.717 14.016,71.74 14.824,71.729 31.339,71.728 32.144,72.213 14.014,72.237 14.821,72.225 31.337,72.225
NetC3_1: C3.1 DA2.12 | length 34.6
  [1]Top w0.25: 64.25,47.913 DA2.12
  [1]Top w0.418: C3.1 45.353,28.268 ccw(c45.353,47.165) 64.25,47.165 64.25,47.913
NetC3_2: C3.2 DA1.8 L1.1 | length 7.6
  [1]Top w0.25: DA1.8@33.251,28.25 33.804,28.25
  [1]Top w0.418: 33.804,28.25 34.812,28.25 34.821,28.259 40.792,28.259 C3.2
NetC8_1: C8.1 DA2.9 | length 34.6
  [1]Top w0.25: 62.75,47.913 DA2.9
  [1]Top w0.418: C8.1 49.53,49.985 ccw(c49.53,52.423) 51.968,52.423 51.968,52.721 cw(c54.353,52.721) 54.353,55.105 cw(c54.353,52.546) 56.911,52.546 56.911,47.624 ccw(c59.831,47.618) 62.75,47.623 62.75,47.913
NetC8_2: C8.2 DA3.8 L3.1 | length 7.6
  [1]Top w0.25: DA3.8@33.251,49.992 33.804,49.992
  [1]Top w0.418: 33.804,49.992 34.809,49.992 34.813,49.989 40.814,49.989 C8.2
NetC9_1: C9.1 DA1.2 L2.2 | length 4.1
  [1]Top w0.25: 29.6,28.25 DA1.2
  [1]Top w0.418: C9.1 26.205,28.242 L2.2 ; L2.2@28.747,28.25 29.6,28.25
NetC9_2: C9.2 DA4.8 L4.1 | length 9.2
  [1]Top w0.25: DA4.8 16.477,28.251
  [1]Top w0.418: 16.477,28.251 C9.2
NetC13_1: C13.1 R1.2 | length 4.3
  [1]Top w0.418: C13.1 R1.2
NetC13_2: C13.2 DA2.1 | length 12.5
  [1]Top w0.25: DA2.1 64.25,52.087
  [1]Top w0.418: 64.25,52.087 64.25,55.751 cw(c66.79,55.751) 66.79,58.291 C13.2
NetC16_1: C16.1 DA2.4 | length 34.6
  [1]Top w0.25: DA2.4 62.75,52.087
  [1]Top w0.418: C16.1 47.254,71.753 47.256,71.753 cw(c47.27,56.273) 62.75,56.273 62.75,52.087
NetC16_2: C16.2 DA5.8 L7.1 | length 7.6
  [1]Top w0.25: DA5.8 33.752,71.735
  [1]Top w0.418: 33.752,71.735 34.812,71.735 34.821,71.744 40.792,71.744 C16.2
NetC18_1: C18.1 DA3.2 L5.2 | length 4.2
  [1]Top w0.25: 29.697,50.007 DA3.2@30.25,50.007
  [1]Top w0.418: C18.1 C18.1@26.066,49.991 ; C18.1@26.075,49.982 L5.2 29.672,49.982
NetC18_2: C18.2 DA6.8 L9.1 | length 8.6
  [1]Top w0.418: 16.489,50 C18.2
NetC21_1: C21.1 DA5.2 L8.2 | length 3.7
  [1]Top w0.418: C21.1 26.205,71.743 L8.2@28.622,71.743 ; L8.2 L8.2@28.88,71.746 ; L8.2@28.891,71.735 29.75,71.735
NetC21_2: C21.2 DA7.8 L11.1 | length 9.2
  [1]Top w0.25: DA7.8@15.928,71.743 16.482,71.743
  [1]Top w0.418: 16.482,71.743 L11.1 C21.2
NetC22_1: C22.1 XW3.1 | length 69
  [1]Top w0.418: C22.1 XW3.1
NetC22_2: C22.2 DA2.15 | length 3.8
  [1]Top w0.25: DA2.15 65.587,50.25
  [1]Top w0.418: 65.587,50.25 C22.2
NetDA4_2: DA4.2 L6.2 XW1.1 | length 11.7
  [1]Top w0.25: 12.364,28.251 DA4.2
  [1]Top w0.418: XW1.1 12.364,28.251
NetDA6_2: DA6.2 L10.2 XW2.1 | length 11.7
  [1]Top w0.25: 12.453,49.989 DA6.2@12.97,49.989
  [1]Top w0.418: XW2.1 12.31,50 ; 12.314,49.996 12.446,49.996
NetDA7_2: DA7.2 L12.2 XW4.1 | length 11.7
  [1]Top w0.25: 12.384,71.747 DA7.2
  [1]Top w0.418: XW4.1 L12.2 12.374,71.757
pads on no net: DA1.11 DA1.12 DA3.11 DA3.12 DA4.11 DA4.12 DA5.11 DA5.12 DA6.11 DA6.12 DA7.11 DA7.12

## Polygon pours and split planes (outlines as drawn)
GND on [1]Top "GND_L01_P002" (solid, pour order 2): 0.2,0.2 0.2,99.8 139.8,99.8 139.8,0.2
GND on [1]Top "NONET_L-01_P-001" (solid, pour order 11): 64.833,51.376 64.724,51.267 64.724,50.626 65.785,50.626 65.869,50.543 66.039,50.713 66.039,51.376
GND on [2]MWGND "GND_L02_P005" (solid, pour order 5): 0.2,0.2 0.2,99.8 139.8,99.8 139.8,0.2
GND on [3]Signal "GND_L03_P007" (solid, pour order 7): 0.2,0.2 0.2,99.8 139.8,99.8 139.8,0.2
GND on [4]Power "GND_L04_P004" (solid, remove dead copper, pour order 4): 0.2,0.2 0.2,99.8 139.8,99.8 139.8,0.2

## Silkscreen, mask and mechanical layers (free items; w line width, h text height)
Top Overlay:
  text "ITMO switch" at 80.01,18.339 h8
Top Solder:
  lines w2.418: 45.353,28.268 ccw(c45.353,47.165) 64.241,46.587 ; 56.911,47.624 ccw(c59.831,47.618) 62.625,46.772
  lines w2.42: 1.513,28.251 11.268,28.251 ; 1.518,50 11.268,50 ; 1.651,71.75 11.268,71.75 ; 17.579,28.251 28.617,28.251 ; 17.579,50 28.913,50 ; 17.579,71.75 28.618,71.747 ; 34.925,49.985 41.775,49.985 ; 35.112,28.259 41.726,28.236 ; 62.75,53.153 62.75,56.273 ; 64.25,53.153 64.25,55.751 ; 66.619,50.25 69.842,50.25 ; 71.026,58.291 75.416,58.291
Mechanical 1:
  lines w0.2: 0,0 63.5,0 63.5,87 ; 1.15,21.75 128.15,21.75 ; 1.151,28.251 31.75,28.251 ; 1.15,43.5 128.15,43.5 ; 1.15,50 31.743,50 31.751,49.993 ; 1.15,65.25 128.15,65.25 ; 1.15,71.75 31.736,71.75 31.751,71.735 ; 11.268,27.971 11.268,85.461 11.278,85.471 ; 14.326,82.347 14.412,82.26 34.823,82.26 ; 14.419,28.244 14.419,80.916 ; 16.104,58.725 16.153,58.675 34.765,58.675 ; 16.256,37.287 16.268,37.275 34.815,37.275 ; 17.577,81.839 17.579,81.837 17.579,28.141 ; 25.578,-58.014 25.578,41.986 ; 25.578,43.482 25.578,143.482 ; 31.75,0 31.75,87 ; 37.084,-35.967 37.084,64.033 ; 41.275,21.768 41.275,121.768 ; 101.778,24.486 101.778,42.621
  lines w0.254: 0,0 127,0 127,87 0,87 0,0
Mechanical 2:
  circle w0.013: c133.506,6.506 r2.65
  circle w0.013: c133.506,93.506 r2.65
  circle w0.013: c6.506,6.506 r2.65
  circle w0.013: c6.506,93.506 r2.65
  lines w0.013: 70.006,0.006 70.006,100.006 ; 0.006,0.006 140.006,0.006 140.006,100.006 0.006,100.006 0.006,0.006
  lines w0.2: 31.751,28.25 31.75,28.251